# Altium PCB PCB_ALICE.PcbDoc
Units mm, origin at the board's own origin, x right, y up, seen from the top; angles counter-clockwise.
Board outline 60 x 88.2 mm, 2 copper layers (Top Layer, Bottom Layer); 12 components, 10 nets, 69 pads, 0 vias.
Unrouted connection lines stored in the file: 1.
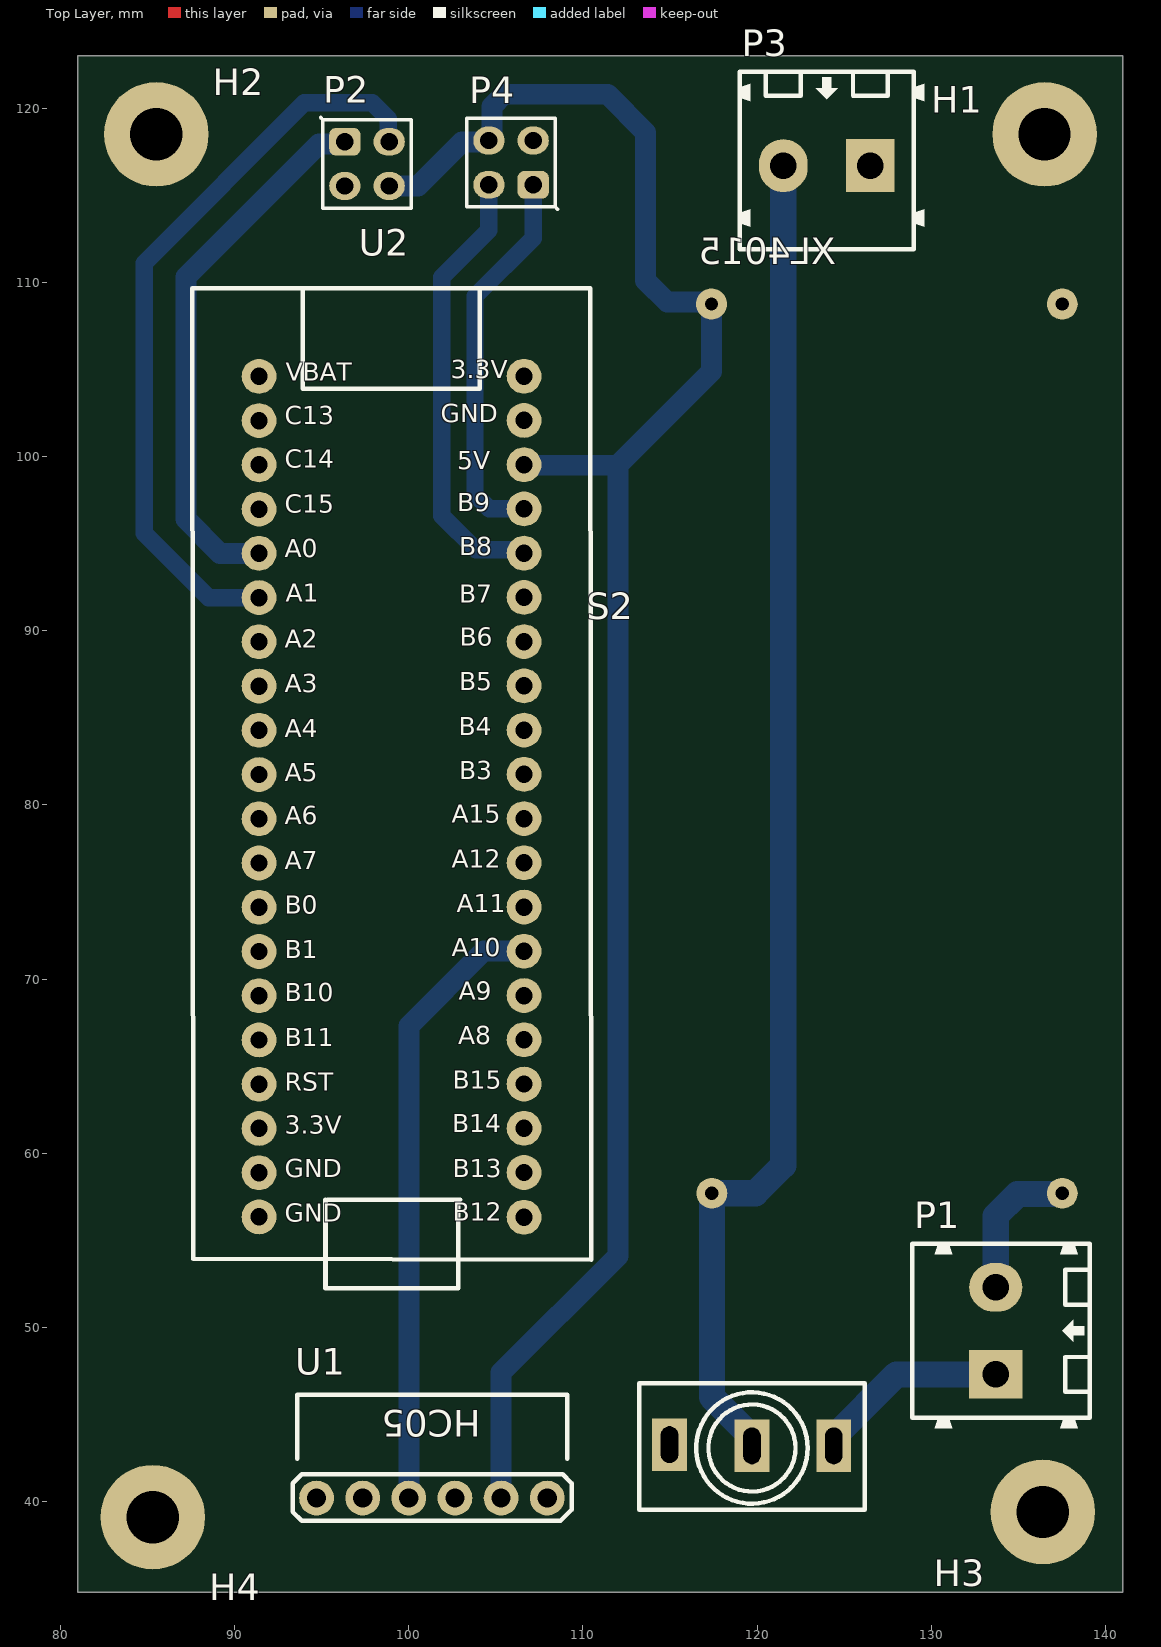
[diagram p0: Top Layer view]
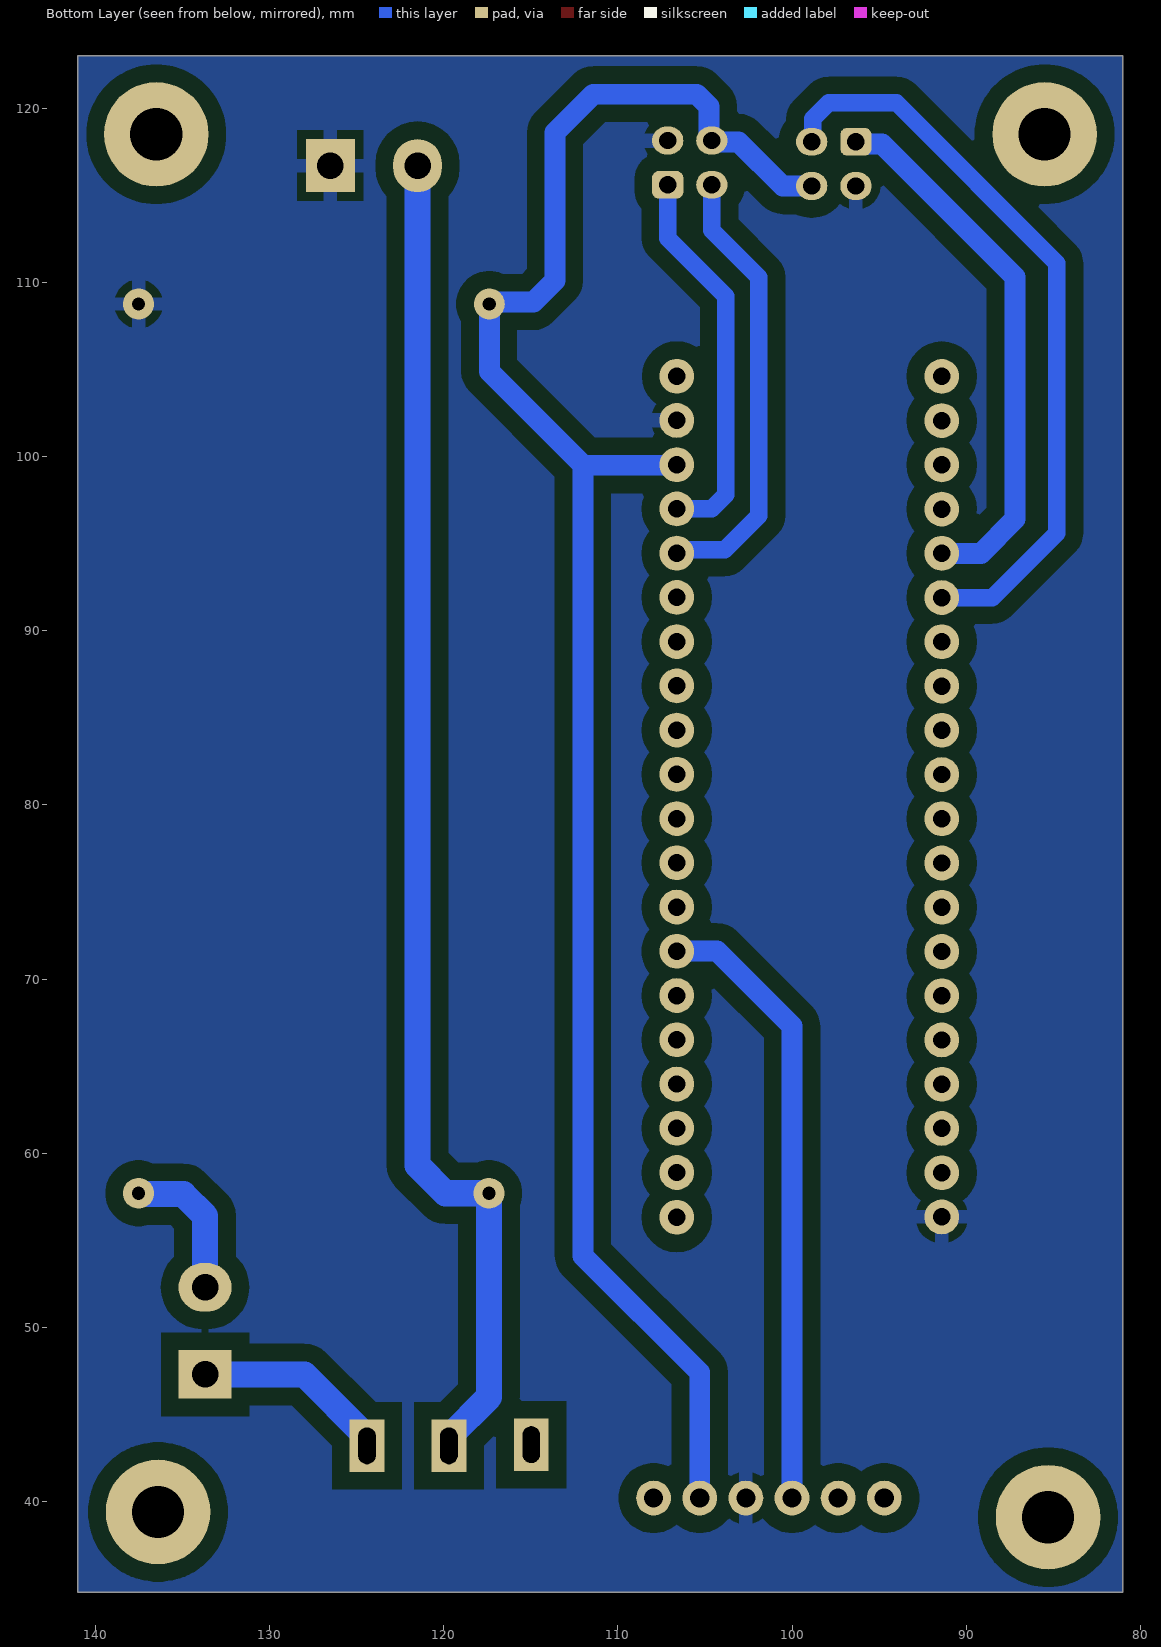
[diagram p1: Bottom Layer view, seen from below]

## Layer stack, top to bottom
Top Solder: solder mask 0.0102, Solder Resist, Dk 3.5
Top Layer: signal copper 0.0356
Dielectric 1: dielectric 0.32, FR-4, Dk 4.8
Bottom Layer: signal copper 0.0356
Bottom Solder: solder mask 0.0102, Solder Resist, Dk 3.5

## Board outline
81,34.8 141,34.8 141,123 81,123

## Design rules (kind name [scope] priority, off if disabled: settings)
Clearance Clearance_Poly [InPolygon] p1: gap=1 ignorepadtopadclearanceinfootprint=FALSE
Clearance Clearance_3 [InComponent('H*')] p2: gap=0 ignorepadtopadclearanceinfootprint=FALSE
Clearance Clearance_2 [InNet('ACL*') OR InNet('ACN*')] p3: gap=0.35 ignorepadtopadclearanceinfootprint=FALSE except(0: Arc-Hole Track-Hole SMDPad-Hole THPad-Hole Via-Hole Fill-Hole Poly-Hole Region-Hole Text-Hole)
Clearance Clearance_1 [InPolygon] p4: gap=0.8 ignorepadtopadclearanceinfootprint=FALSE
Clearance [All] p5: gap=0.3 ignorepadtopadclearanceinfootprint=FALSE except(0: Arc-Hole Track-Hole SMDPad-Hole THPad-Hole Via-Hole Fill-Hole Poly-Hole Region-Hole Text-Hole)
ComponentClearance ComponentClearance_1 [InComponent('M802') OR  InComponent('P104') OR InComponent('Y202') OR InComponent('C101') OR InComponent('P101') OR InComponent('L101') OR  InComponent('S309') OR InComponent('S310') OR InComponent('H*')] p1: gap=0 collisioncheckmode=3 verticalgap=0 showdistances=FALSE
ComponentClearance [All] p2: gap=0.254 collisioncheckmode=3 verticalgap=0.254 showdistances=FALSE
Height [All] p1: minheight=0 maxheight=30 prefheight=12.7
PolygonConnect PolygonConnect_1 [IsVia] p1: connectstyle=Direct reliefconductorwidth=0.254 reliefentries=4 polygonreliefangle="90 Angle" airgapwidth=0.254
PolygonConnect PolygonConnect_2 [InNet('GND')] p2: connectstyle=Relief reliefconductorwidth=0.8 reliefentries=4 polygonreliefangle="90 Angle" airgapwidth=0.5
PolygonConnect [All] p3: connectstyle=Relief reliefconductorwidth=0.5 reliefentries=4 polygonreliefangle="90 Angle" airgapwidth=0.635
RoutingVias [All] p1: holewidth=0.4 width=0.8 viastyle="Through Hole" minholewidth=0.3 minwidth=0.6 maxholewidth=2 maxwidth=5
SolderMaskExpansion [All] p1: expansion=0.102 istentingtop=FALSE
SupplyNets "Schematic Supply Nets" [InNet('GND')] p1: voltage=0.000
SupplyNets "Schematic Supply Nets_2" [InNet('+12')] p2: voltage=0.000
SupplyNets "Schematic Supply Nets_1" [InNet('+5')] p3: voltage=0.000
Width [All] p1: maxlimit=50 minlimit=0.2 preferedwidth=0.3
28 further rules are at their usual default settings.

## Components (designator, comment, footprint, x,y, rotation, side; value= is the part's Value field where it differs from the comment)
H1 "Screw Hole" SCREW/3.0/6.0 136.5,118.5 r0 top
H2 "Screw Hole" SCREW/3.0/6.0 85.5,118.5 r0 top
H3 "Screw Hole" SCREW/3.0/6.0 136.4,39.4 r0 top
H4 "Screw Hole" SCREW/3.0/6.0 85.3,39.1 r0 top
P1 "Bat_12V" HDR/Terminal/2/5mm 133.7,49.8 r90 top
P2 "BTS_Left" HDR/Header/4/DL 97.6,116.8 r270 top
P3 "BTS_12V" HDR/Terminal/2/5mm 124,116.7 r180 top
P4 "BTS_Right" HDR/Header/4/DL 105.87,116.87 r90 top
S2 "TOGGLE_SWITCH_SPDT" TOGGLE_SWITCH_SPDT 119.684,43.231 r0 top
U1 "BT" HC05 101.341,45.5 r180 top
U2 "STM32F103C8T6" "Stm32 BluePill" 98.786,86.234 r0 top
XL4015 "BUCK" PCBComponent_1 127.636,82.592 r180 top

## Footprints (in the part's own frame and the unit in brackets; to place one, negate y for a bottom-side part, rotate by r counter-clockwise, add the part's x,y. Pads: shape width x height; smd on the part's side, far side on the other; paste and mask are expansions set on the pad)
HC05 [mm]
  round 2 hole 1.1: 1(-6.605,5.3) 2(-3.956,5.3) 3(-1.308,5.3) 4(1.341,5.3) 5(3.99,5.3) 6(6.639,5.3)
  silkscreen extent -8,-0.64 8,6.6, body extent -8,-1 8,5.55, height 39.5
HDR/Header/4/DL [mm]
  rrect50% 1.6x1.8 hole 1: 1(-1.27,-1.27)
  oval 1.6x1.8 hole 1: 2(-1.27,1.27) 3(1.27,-1.27) 4(1.27,1.27)
  silkscreen extent -2.67,-2.67 2.54,2.54, body extent -2.54,-2.54 2.54,2.54, height 8.89
HDR/Terminal/2/5mm [mil] "Header 2, 2 pin, hight 400mil, Pin to Pin 200mil, Colour Green"
  rect 110x120 hole 60: 1(-98.43,0)
  oval 110x120 hole 60: 2(98.42,0)
  silkscreen extent -220,-213 197,189, body extent -220,-215 197,191, height 559
PCBComponent_1 [mil]
  round 70 hole 30: 1(403,980) 2(-389,980) 3(404,-1030) 4(-389,-1030)
  body extent -444,-1090 462,1036, height 595
SCREW/3.0/6.0 [mm]
  round 6 hole 3: 1(0,0)
  Top Layer pour cut-out: -4,0 -3.696,1.531 -2.828,2.828 -1.531,3.695 0,4 0,4 1.531,3.695 2.828,2.828 3.695,1.531 4,0 4,0 3.696,-1.531 2.828,-2.828 1.531,-3.696 0,-4 0,-4 -1.531,-3.696 -2.828,-2.828 -3.696,-1.531 -4,0
  Bottom Layer pour cut-out: -4,0 -3.696,1.531 -2.828,2.828 -1.531,3.695 0,4 0,4 1.531,3.695 2.828,2.828 3.695,1.531 4,0 4,0 3.696,-1.531 2.828,-2.828 1.531,-3.696 0,-4 0,-4 -1.531,-3.696 -2.828,-2.828 -3.696,-1.531 -4,0
"Stm32 BluePill" [mm]
  round 2 hole 1: 1(7.828,-29.908) 2(7.828,-27.343) 3(7.828,-24.803) 4(7.828,-22.263) 5(7.828,-19.723) 6(7.828,-17.183) 7(7.828,-14.643) 8(7.828,-12.103) 9(7.828,-9.563) 10(7.828,-7.023) 11(7.828,-4.483) 12(7.828,-1.943) 13(7.828,0.597) 14(7.828,3.137) 15(7.828,5.677) 16(7.828,8.217) 17(7.828,10.757) 18(7.828,13.297) 19(7.828,15.837) 20(7.828,18.377) 21(-7.386,18.366) 22(-7.386,15.826) 23(-7.386,13.286) 24(-7.386,10.746) 25(-7.386,8.206) 26(-7.386,5.666) 27(-7.386,3.126) 28(-7.386,0.586) 29(-7.386,-1.954) 30(-7.386,-4.494) 31(-7.386,-7.034) 32(-7.386,-9.574) 33(-7.386,-12.114) 34(-7.386,-14.654) 35(-7.386,-17.194) 36(-7.386,-19.734) 37(-7.386,-22.274) 38(-7.386,-24.814) 39(-7.386,-27.354) 40(-7.386,-29.894)
  silkscreen extent -11.22,-34 11.69,23.43, body extent -11.18,-33.27 11.68,24.29, height 12.31
TOGGLE_SWITCH_SPDT [mm]
  rect 2x3 hole 1 slot 2.1 at 90 deg: 1(-4.715,0.031) 2(0.016,-0.031) 3(4.715,-0.031)
  silkscreen extent -6.46,-3.71 6.49,3.56, body extent -6.49,-6.02 6.52,5.96, height 30.32

## Part data
P1 P3: library part "Header 2", "Header, 2-Pin"
P2 P4: library part "Header 2X2", "Header, 2-Pin, Dual row"
S2: "Toggle Switch SPDT, 125V AC, 6A, 33x13x7mm.", JLCPCB PN=C2921493
U1: library part HC05, "Bluetooth HC05 Module"
U2: library part BluePill, "Designed By @Alixahedi"
H1 H2 H3 H4: TYPE=NO-BOM, UNIT PRICE=0

## Nets (pads, with @x,y where several pads share a name; then routed paths per layer and width w, separated by ;. In a path a pad name is that pad's centre, name@x,y a point inside that pad or via, vN(x,y) a via of type N, cw(c..) or ccw(c..) an arc to the next point about the centre after c; other vN are vias at no path point)
+5: P2.4 P4.4 U1.2 U2.18 XL4015.3 | length 110.7
  Bottom Layer w1.2: P2.4 100.53,115.53 103.063,118.063 104.523,118.063 104.777,118.317 104.777,120.097 105.479,120.8 111.4,120.8 113.6,118.6 113.6,110.1 114.835,108.865 117.264,108.865 XL4015.3 117.375,104.875 112,99.5 ; U1.2 105.298,47.398 112,54.1 112,99.5 ; U2.18 106.645,99.5 112,99.5
+12: P3.2 S2.2 XL4015.1 | length 77.6
  Bottom Layer w1.5: S2.2 119.7,43.7 117.4,46 XL4015.1 119.9,57.7 121.5,59.3 P3.2
B+: P1.1 S2.3 | length 11.3
  Bottom Layer w1.5: S2.3 124.399,43.7 127.999,47.3 P1.1
B-: P1.2 XL4015.2 | length 8.5
  Bottom Layer w1.5: P1.2 133.7,56.4 134.947,57.647 137.464,57.647 XL4015.2
GND: P2.3 P3.1 P4.3 U1.3 U2.19 U2.40 XL4015.4
LPWM1: P2.1 U2.25 | length 31.3
  Bottom Layer w1.2: U2.25 89.16,94.44 87.2,96.4 87.2,110.3 94.844,117.944 96.204,117.944 P2.1
LPWM2: P4.1 U2.17 | length 22.3
  Bottom Layer w1: U2.17 104.609,96.991 103.8,97.8 103.8,109.2 107.14,112.54 P4.1
RPWM1: P2.2 U2.26 | length 43.2
  Bottom Layer w1: U2.26 88.5,91.9 84.8,95.6 84.8,111.1 94,120.3 97.9,120.3 98.812,119.388 98.812,118.137 P2.2@98.87,118.078
RPWM2: P4.2 U2.16 | length 25.7
  Bottom Layer w1: P4.2 104.6,113 101.9,110.3 101.9,96.6 103.858,94.642 106.423,94.642 U2.16
Tx_HC05: U1.4 U2.7 | length 35.5
  Bottom Layer w1.2: U1.4 100,67.3 104.3,71.6 106.605,71.6 U2.7
pads on no net: H1.1 H2.1 H3.1 H4.1 S2.1 U1.1 U1.5 U1.6 U2.1 U2.2 U2.3 U2.4 U2.5 U2.6 U2.8 U2.9 U2.10 U2.11 U2.12 U2.13 U2.14 U2.15 U2.20 U2.21 U2.22 U2.23 U2.24 U2.27 U2.28 U2.29 U2.30 U2.31 U2.32 U2.33 U2.34 U2.35 U2.36 U2.37 U2.38 U2.39

## Polygon pours and split planes (outlines as drawn)
GND on Bottom Layer "GND" (solid, remove dead copper, pour order 0): 81,34.8 141,34.8 141,123 81,123

## Text inside footprints (layer, text, board x,y; h text height)
U1: Top Overlay "HC05" at 104.134,45.246 h1.52 r180
U2: Top Overlay "B12" at 102.535,55.779 h1.78; Top Overlay "GND" at 92.873,55.723 h1.78; Top Overlay "B13" at 102.525,58.288 h1.78; Top Overlay "GND" at 92.873,58.288 h1.78; Top Overlay "A1" at 92.944,91.314 h1.78; Top Overlay "A0" at 92.873,93.874 h1.78; Top Overlay "C14" at 92.873,99.005 h1.78; Top Overlay "C13" at 92.873,101.494 h1.78; Top Overlay "C15" at 92.873,96.439 h1.78; Top Overlay "B6" at 102.937,88.794 h1.78; Top Overlay "B4" at 102.873,83.643 h1.78; Top Overlay "B7" at 102.906,91.263 h1.78; Top Overlay "B14" at 102.505,60.859 h1.78; Top Overlay "B5" at 102.906,86.228 h1.78; Top Overlay "VBAT" at 92.946,104.014 h1.78; Top Overlay "A10" at 102.472,70.963 h1.78; Top Overlay "A12" at 102.472,76.049 h1.78; Top Overlay "A15" at 102.472,78.634 h1.78; Top Overlay "A9" at 102.873,68.474 h1.78; Top Overlay "B3" at 102.906,81.123 h1.78; Top Overlay "A11" at 102.759,73.483 h1.78; Top Overlay "A8" at 102.843,65.908 h1.78; Top Overlay "B15" at 102.535,63.343 h1.78; Top Overlay "3.3V" at 92.873,60.778 h1.78; Top Overlay "B1" at 92.873,70.842 h1.78; Top Overlay "B0" at 92.873,73.401 h1.78; Top Overlay "A7" at 92.873,75.947 h1.78; Top Overlay "A6" at 92.873,78.532 h1.78; Top Overlay "B11" at 92.873,65.787 h1.78; Top Overlay "B10" at 92.873,68.372 h1.78; Top Overlay "RST" at 92.873,63.241 h1.78; Top Overlay "A4" at 92.873,83.542 h1.78; Top Overlay "A3" at 92.873,86.127 h1.78; Top Overlay "A2" at 92.873,88.672 h1.78; Top Overlay "A5" at 92.873,81.021 h1.78; Top Overlay "GND" at 101.834,101.621 h1.78; Top Overlay "3.3V" at 102.398,104.135 h1.78; Top Overlay "B8" at 102.906,93.975 h1.78; Top Overlay "B9" at 102.779,96.515 h1.78; Top Overlay "5V" at 102.779,98.928 h1.78
XL4015: Mechanical 1 "IN+" at 123.191,57.344 h1.52; Mechanical 1 "IN-" at 135.256,57.344 h1.52; Mechanical 1 "OUT-" at 135.383,107.814 h1.52; Mechanical 1 "OUT+" at 124.868,107.865 h1.52